# Altium PCB PCB1.PcbDoc
Units mm, origin at the board's own origin, x right, y up, seen from the top; angles counter-clockwise.
Board outline 90.17 x 95.89 mm, 4 copper layers (Top Layer, Internal Plane 1, Internal Plane 2, Bottom Layer), stack 1.347 mm thick; 6 components, 86 nets, 130 pads, 48 vias.
Unrouted connection lines stored in the file: 8.
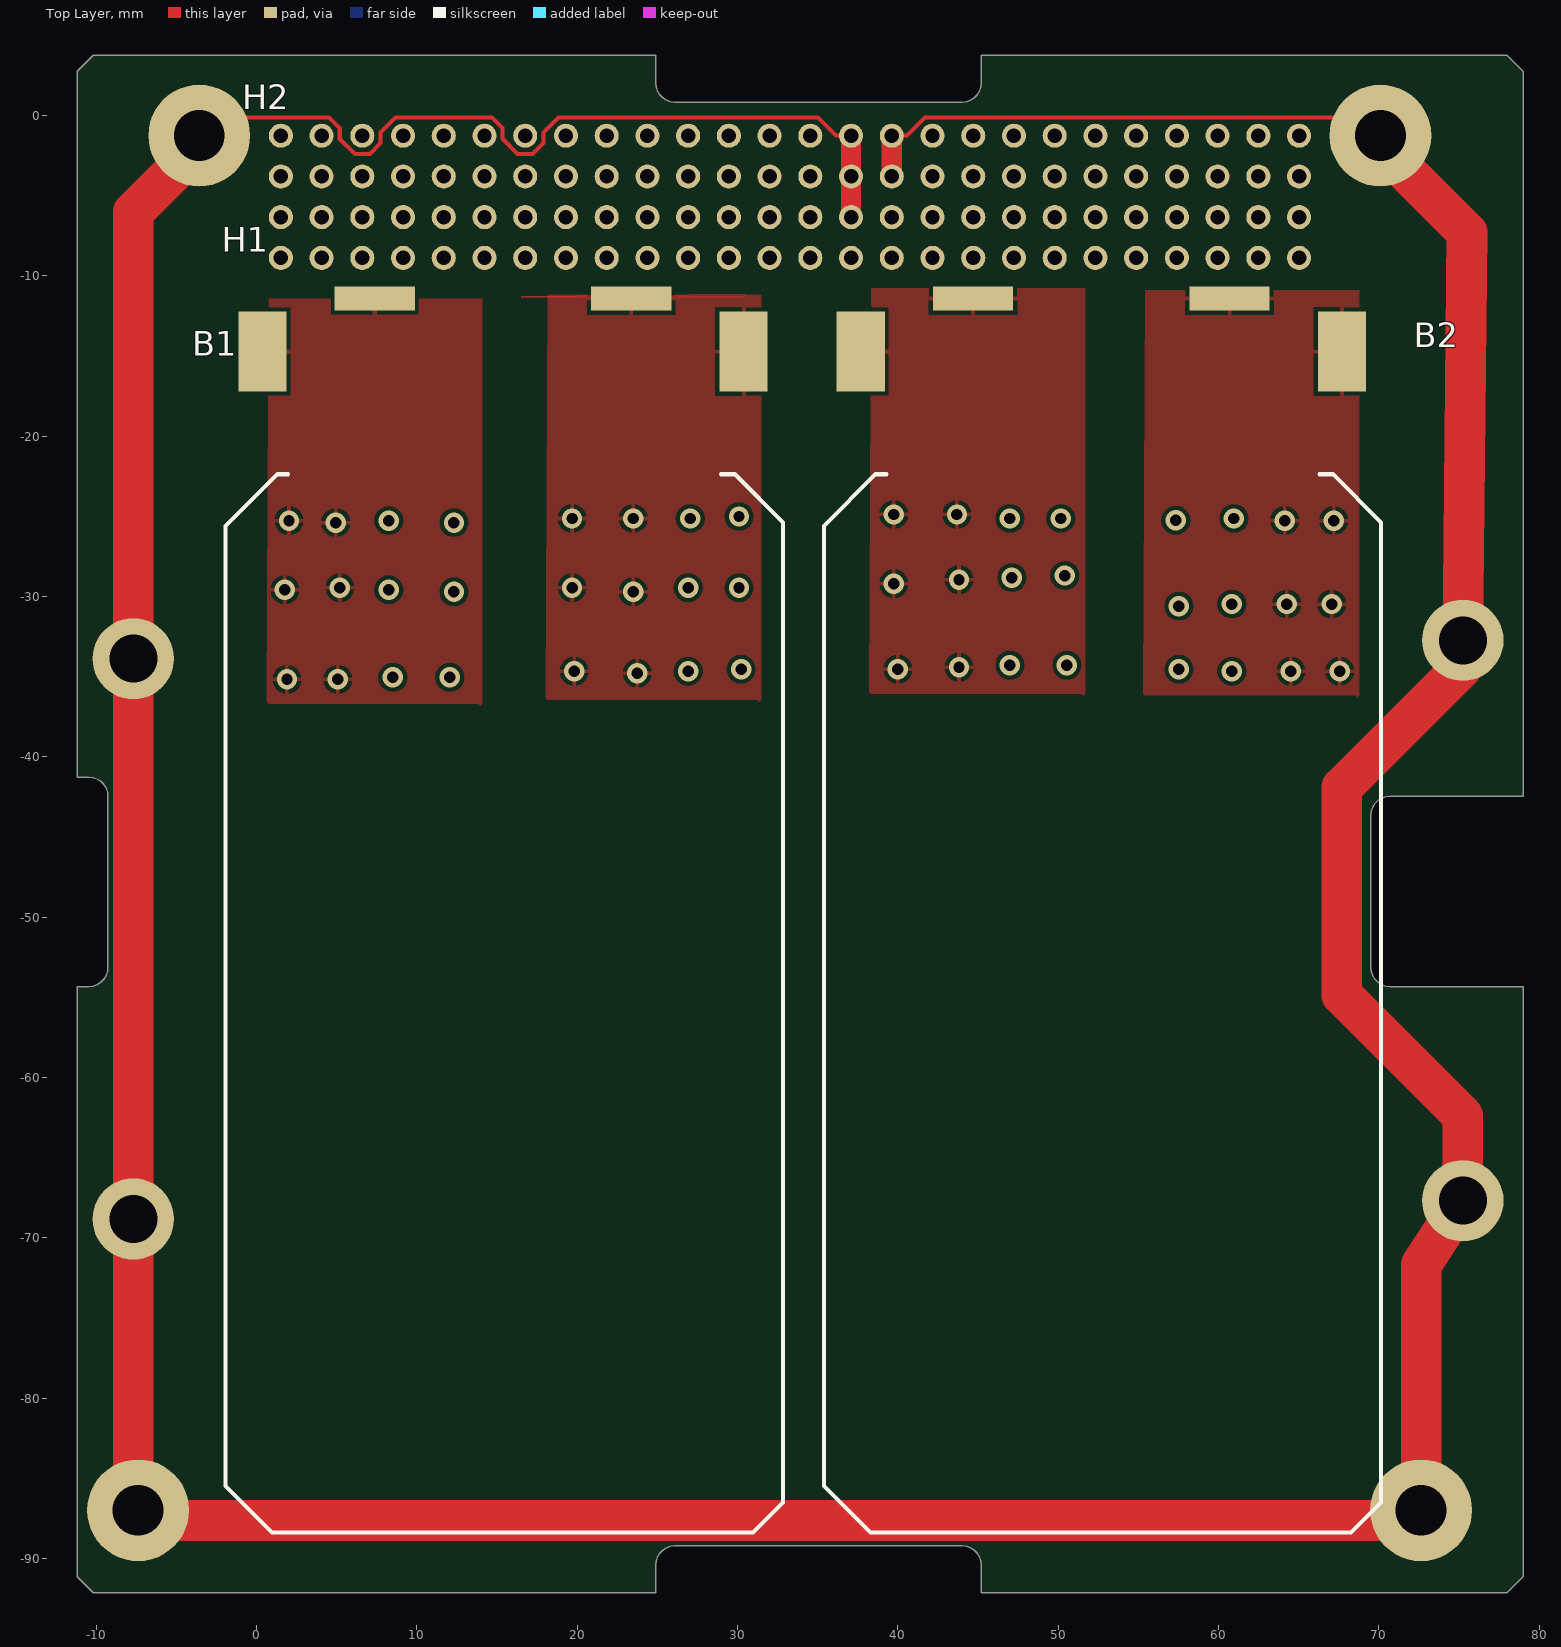
[diagram p0: Top Layer view]
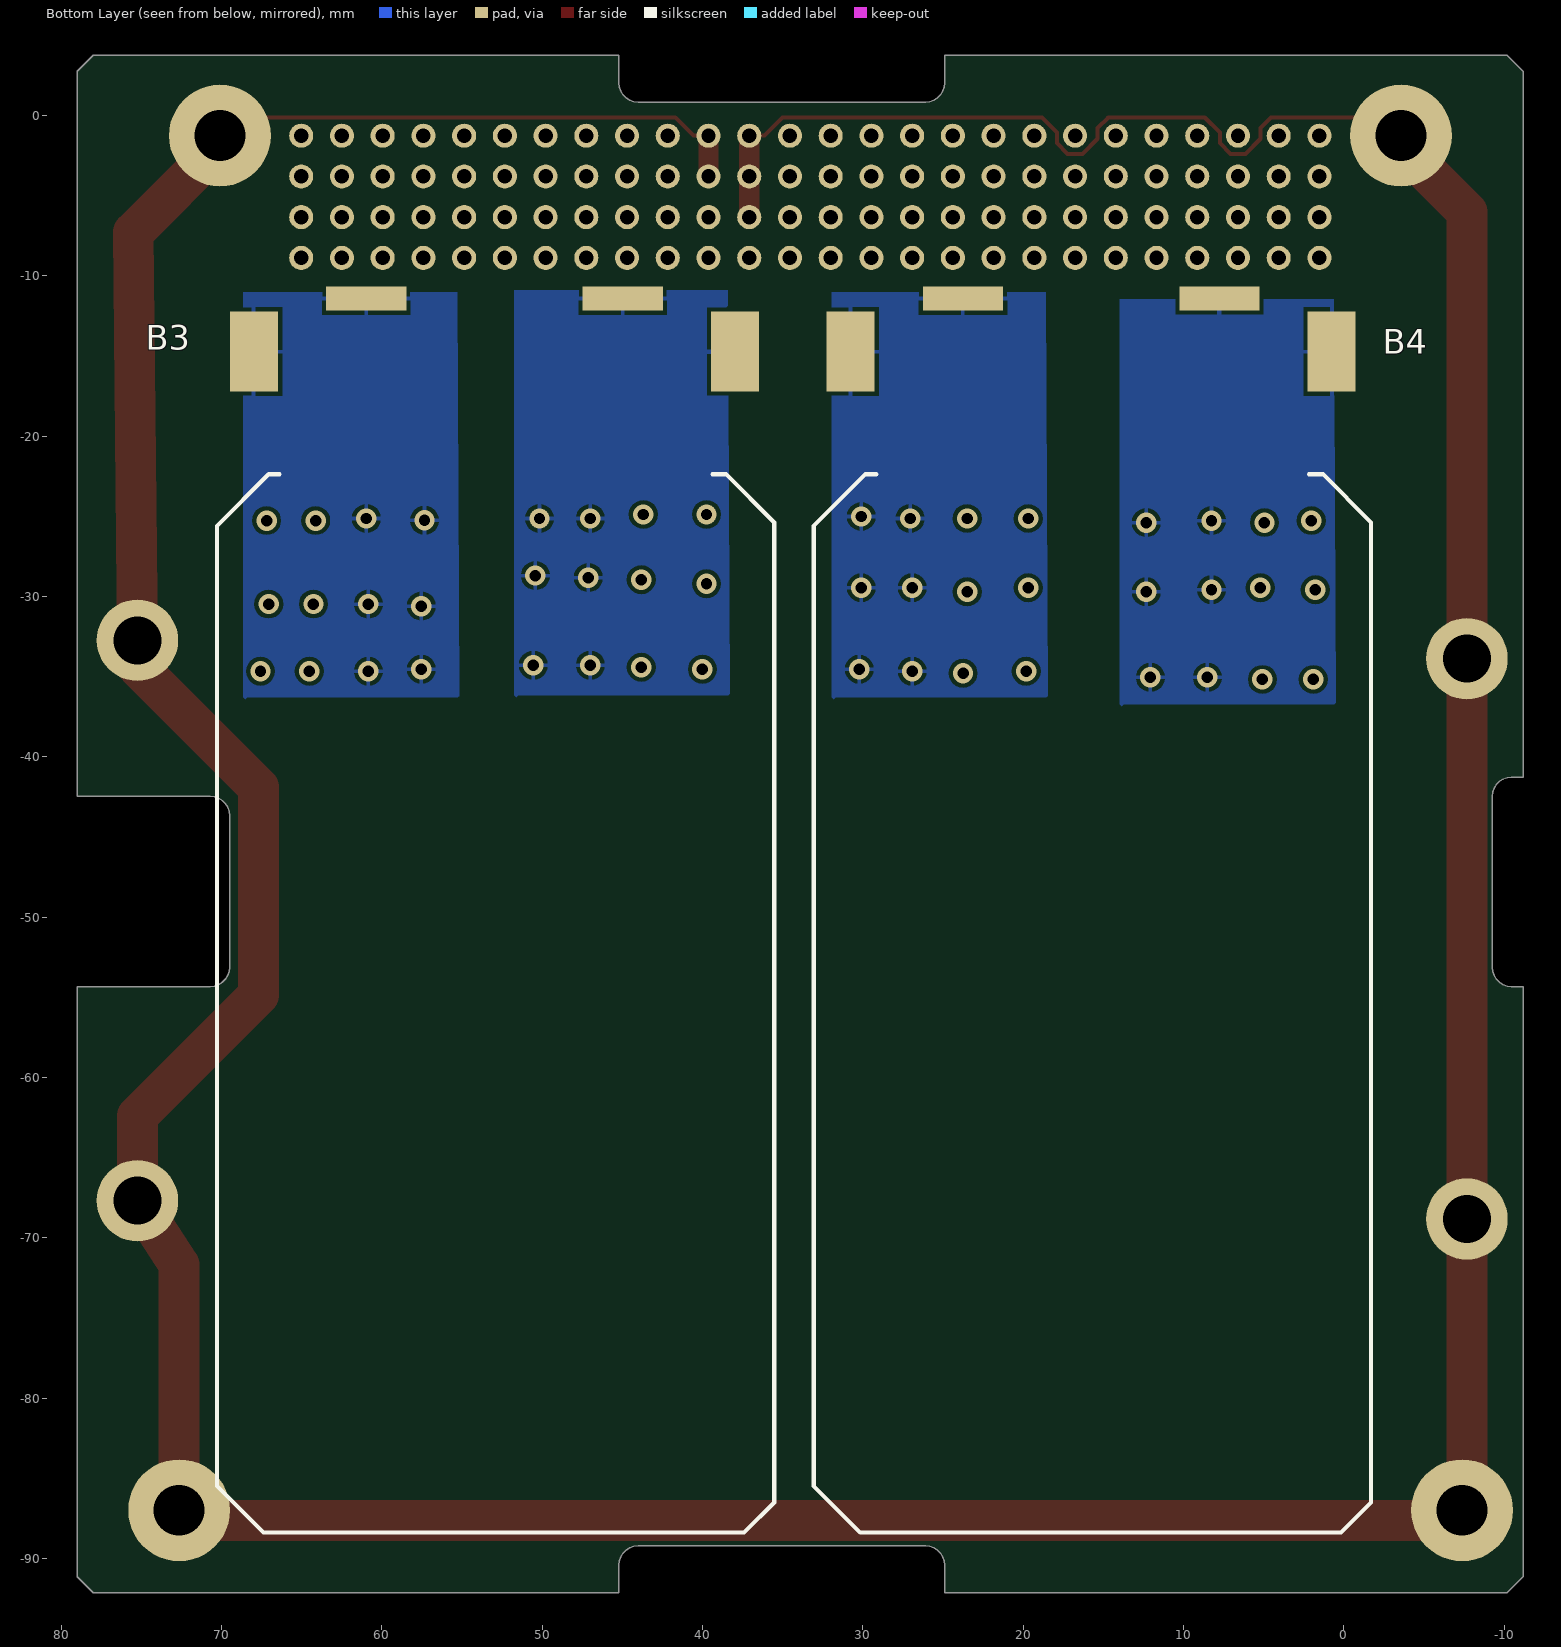
[diagram p1: Bottom Layer view, seen from below]
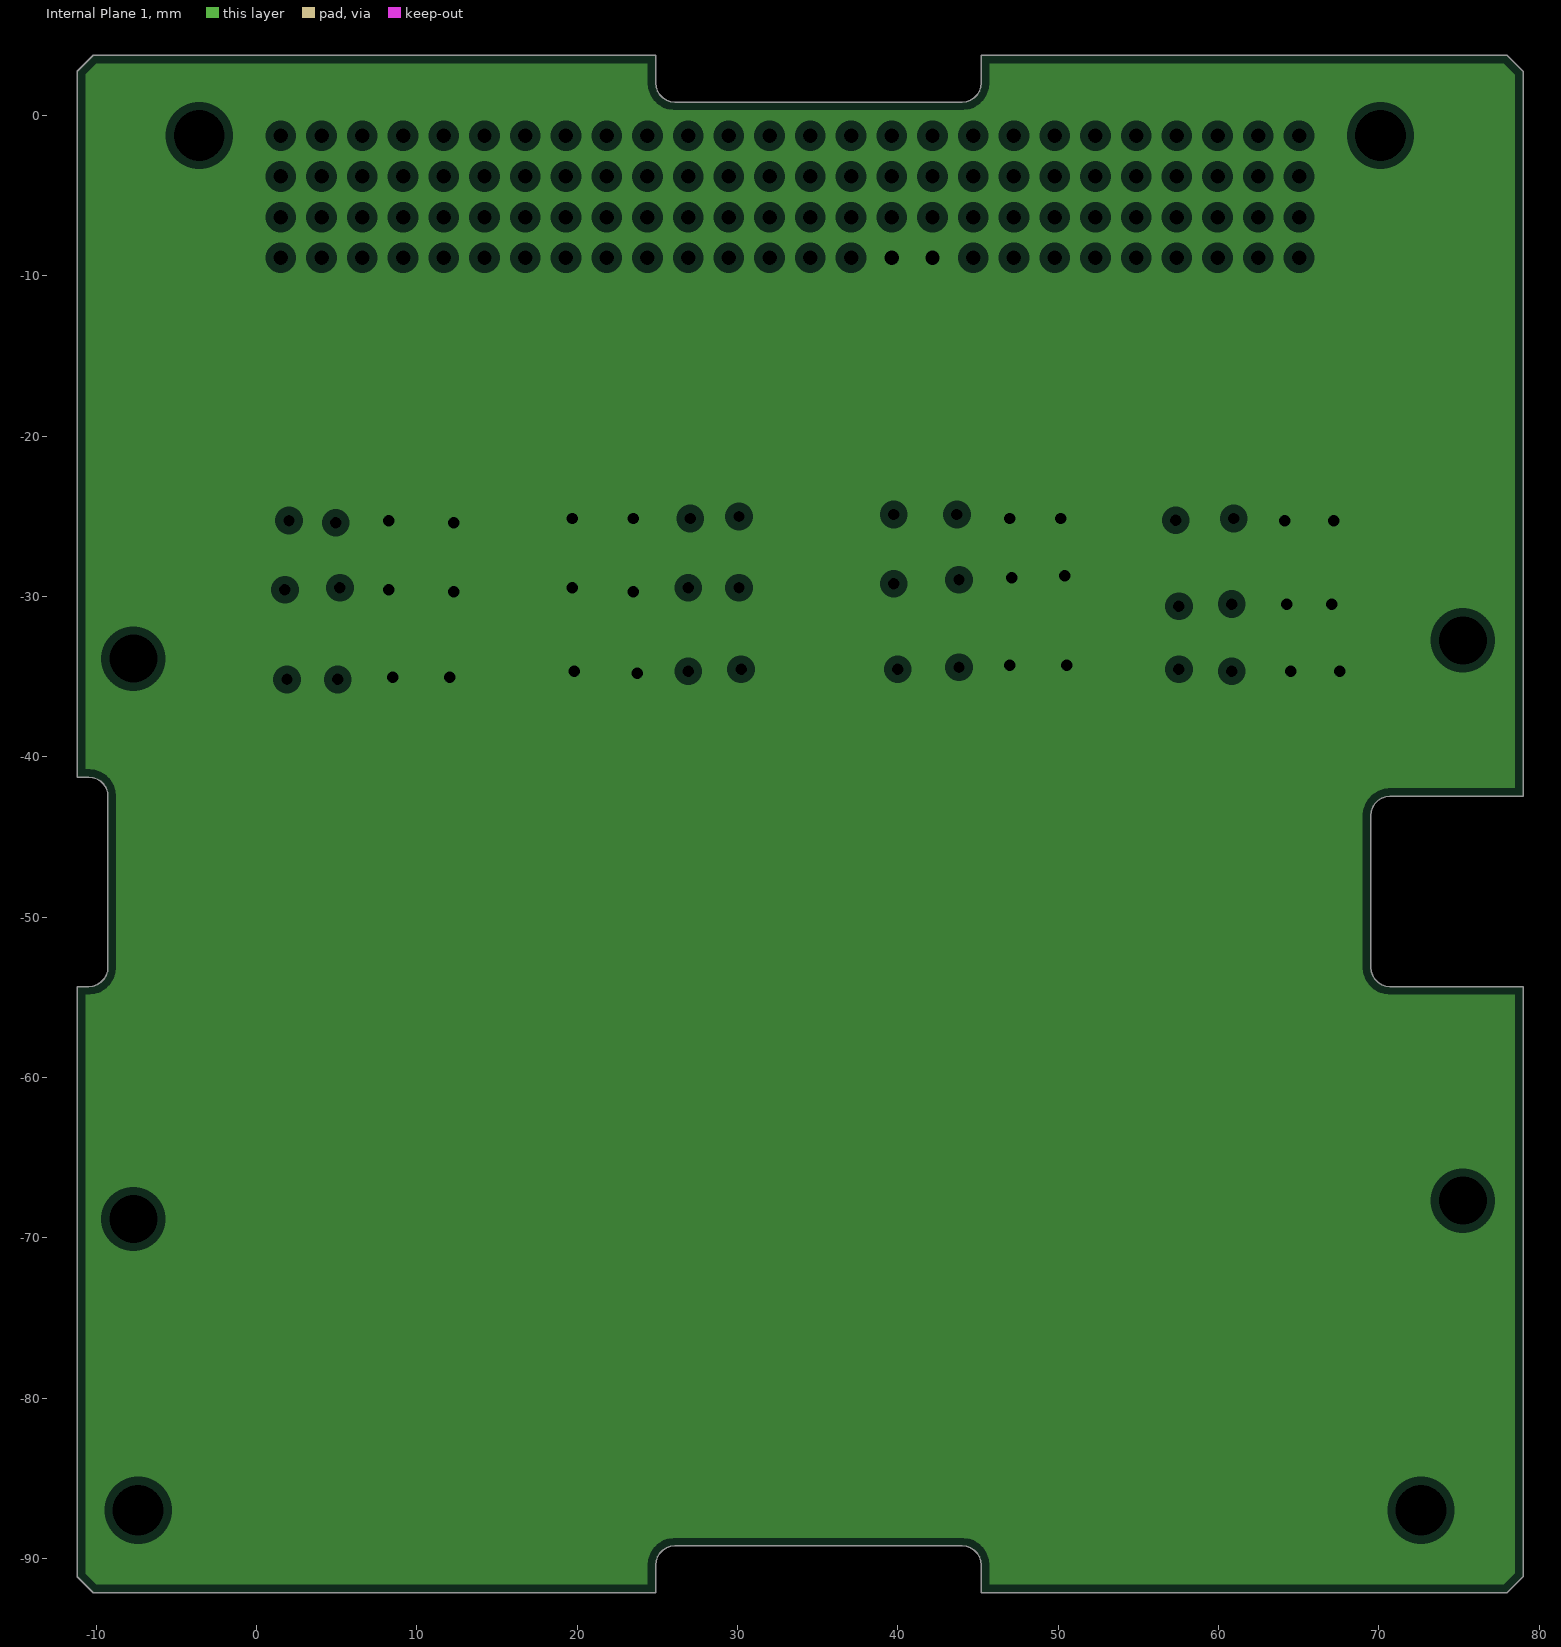
[diagram p2: Internal Plane 1, clearances drawn from the general rule]
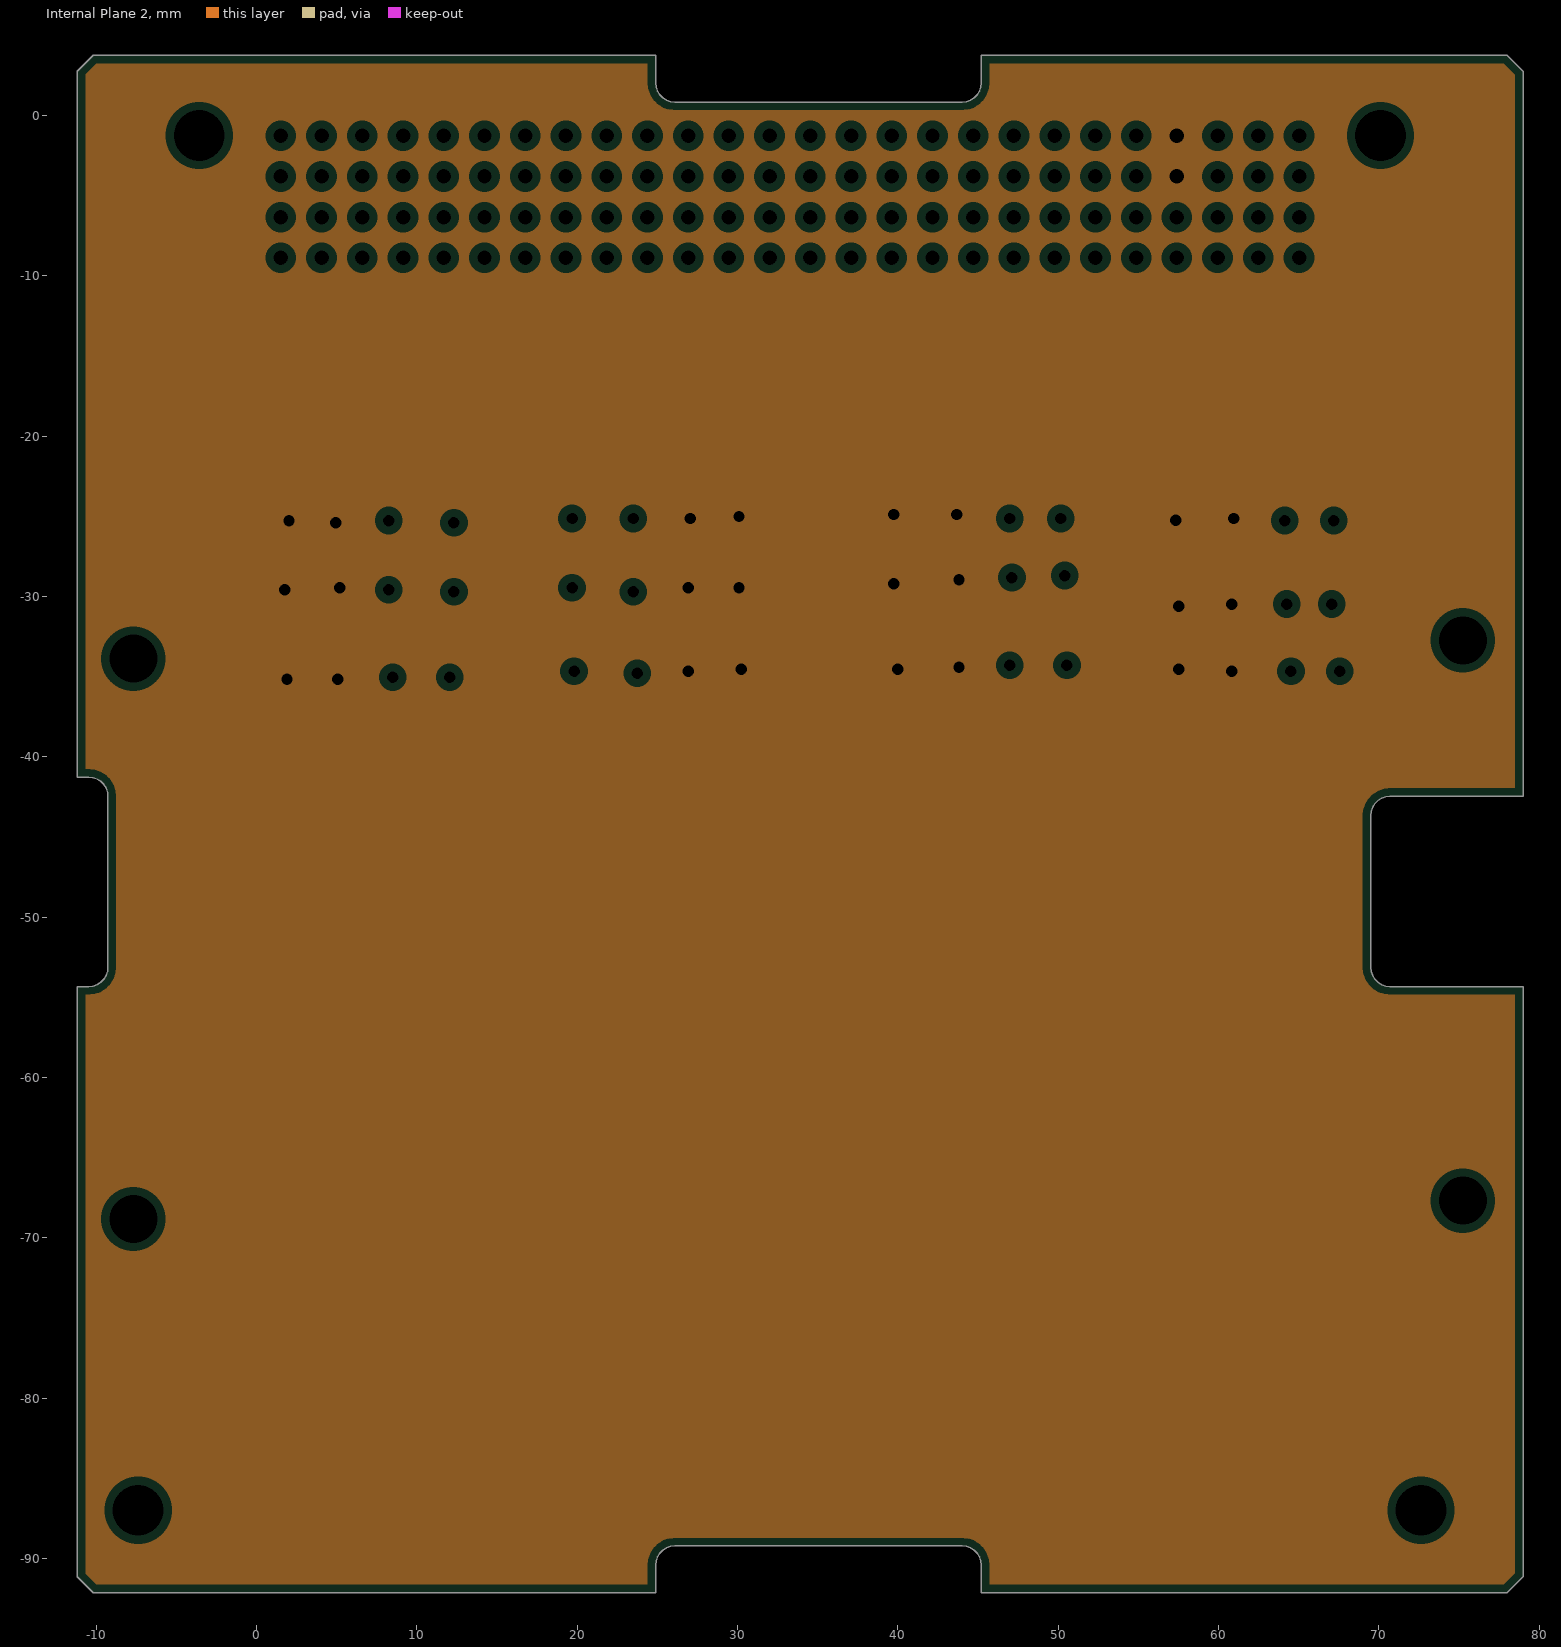
[diagram p3: Internal Plane 2, clearances drawn from the general rule]

## Layer stack, top to bottom
Top Solder: solder mask 0.0102, Solder Resist, Dk 3.5
Top Layer: signal copper 0.0356
Dielectric 1: core 0.475, FR-4, Dk 4.2
Internal Plane 1: plane copper 0.036, net VBAT-
Dielectric 3: core 0.254, Dk 4.2
Internal Plane 2: plane copper 0.036, net VIN
Dielectric 2: core 0.475, Dk 4.2
Bottom Layer: signal copper 0.0356
Bottom Solder: solder mask 0.0102, Solder Resist, Dk 3.5

## Board outline
77.994,3.749 45.214,3.749 45.214,2.029 45.184,1.762 45.095,1.508 44.952,1.281 44.762,1.091 44.535,0.948 44.281,0.859 44.014,0.829 26.094,0.829 25.827,0.859 25.573,0.948 25.346,1.091 25.156,1.281 25.013,1.508 24.924,1.762 24.894,2.029 24.894,3.749 -10.176,3.749 -11.176,2.749 -11.176,-41.271 -10.456,-41.271 -10.189,-41.301 -9.935,-41.39 -9.708,-41.533 -9.518,-41.723 -9.375,-41.95 -9.286,-42.204 -9.256,-42.471 -9.256,-53.131 -9.286,-53.398 -9.375,-53.652 -9.518,-53.879 -9.708,-54.069 -9.935,-54.212 -10.189,-54.301 -10.456,-54.331 -11.176,-54.331 -11.176,-91.141 -10.176,-92.141 24.894,-92.141 24.894,-90.421 24.924,-90.154 25.013,-89.9 25.156,-89.673 25.346,-89.483 25.573,-89.34 25.827,-89.251 26.094,-89.221 44.014,-89.221 44.281,-89.251 44.535,-89.34 44.762,-89.483 44.952,-89.673 45.095,-89.9 45.184,-90.154 45.214,-90.421 45.214,-92.141 77.994,-92.141 78.994,-91.141 78.994,-54.331 70.694,-54.331 70.427,-54.301 70.173,-54.212 69.946,-54.069 69.756,-53.879 69.613,-53.652 69.524,-53.398 69.494,-53.131 69.494,-43.671 69.524,-43.404 69.613,-43.15 69.756,-42.923 69.946,-42.733 70.173,-42.59 70.427,-42.501 70.694,-42.471 78.994,-42.471 78.994,2.749

## Design rules (kind name [scope] priority, off if disabled: settings)
Clearance [All] p1: gap=0.254
PlaneClearance [All] p1: clearance=0.508
PlaneConnect [All] p1: planeconnectstyle=Relief reliefexpansion=0.508 reliefentries=4 reliefconductorwidth=0.254 reliefairgap=0.254
PolygonConnect [All] p1: connectstyle=Relief reliefconductorwidth=0.254 reliefentries=4 polygonreliefangle="90 Angle" airgapwidth=0.254
RoutingVias [All] p1: holewidth=0.711 width=1.27 viastyle="Through Hole" minholewidth=0.711 minwidth=1.27 maxholewidth=0.711 maxwidth=1.27
SolderMaskExpansion [All] p1: expansion=0.102
Width [All] p1: maxlimit=0.254 minlimit=0.254 preferedwidth=0.254
27 further rules are at their usual default settings.

## Components (designator, comment, footprint, x,y, rotation, side; value= is the part's Value field where it differs from the comment)
B1 "Battery-Prot" Batt-Prot 15.381,-12.232 r0 top
B2 "Battery-Prot" Batt-Prot 52.691,-12.232 r0 top
B3 "Battery-Prot" Batt-Prot 52.973,-12.232 r180 bottom
B4 "Battery-Prot" Batt-Prot 15.762,-12.232 r180 bottom
H1 "H?" SAMTEC_ESQ_126_39_G_D 1.524,-8.89 r90 top
H2 "H?" SAMTEC_ESQ_126_39_G_D 1.524,-3.81 r90 top

## Footprints (in the part's own frame and the unit in brackets; to place one, negate y for a bottom-side part, rotate by r counter-clockwise, add the part's x,y. Pads: shape width x height; smd on the part's side, far side on the other; paste and mask are expansions set on the pad)
Batt-Prot [mm]
  rect 3x5 smd: EB+(-15,-2.5) EB-(15,-2.5)
  rect 5x1.5 smd: EB+(-8,0.8) EB-(8,0.8)
  silkscreen extent -17.3,-76.15 17.45,-10.15, body extent -17.43,-76.52 17.53,-0.1, height 8.97
SAMTEC_ESQ_126_39_G_D [mm]
  round 1.5 hole 0.9: 1(0,0) 2(2.54,0) 3(0,-2.54) 4(2.54,-2.54) 5(0,-5.08) 6(2.54,-5.08) 7(0,-7.62) 8(2.54,-7.62) 9(0,-10.16) 10(2.54,-10.16) 11(0,-12.7) 12(2.54,-12.7) 13(0,-15.24) 14(2.54,-15.24) 15(0,-17.78) 16(2.54,-17.78) 17(0,-20.32) 18(2.54,-20.32) 19(0,-22.86) 20(2.54,-22.86) 21(0,-25.4) 22(2.54,-25.4) 23(0,-27.94) 24(2.54,-27.94) 25(0,-30.48) 26(2.54,-30.48) 27(0,-33.02) 28(2.54,-33.02) 29(0,-35.56) 30(2.54,-35.56) 31(0,-38.1) 32(2.54,-38.1) 33(0,-40.64) 34(2.54,-40.64) 35(0,-43.18) 36(2.54,-43.18) 37(0,-45.72) 38(2.54,-45.72) 39(0,-48.26) 40(2.54,-48.26) 41(0,-50.8) 42(2.54,-50.8) 43(0,-53.34) 44(2.54,-53.34) 45(0,-55.88) 46(2.54,-55.88) 47(0,-58.42) 48(2.54,-58.42) 49(0,-60.96) 50(2.54,-60.96) 51(0,-63.5) 52(2.54,-63.5)
  body extent -1.27,-65.02 3.81,1.52, height 11.05

## Part data
H1 H2: library part SAMTEC_ESQ_126_39_G_D, "26X2 header"

## Free pads (board coordinates)
  round 5.08 hole 3: 1(-7.676,-68.831) 1(-7.676,-33.884) 1(75.24,-67.688) 1(75.24,-32.741)
  round 6.35 hole 3.175: 1(-7.375,-86.995) 1(-3.565,-1.265) 1(70.095,-1.265) 1(72.635,-86.995)
  round 0.5 on Drill Guide: 1(2.794,-8.951) 1(2.794,-3.871)

## Via types
v1: diameter 1.27, hole 0.711, Top Layer to Bottom Layer, 48 vias

## Nets (pads, with @x,y where several pads share a name; then routed paths per layer and width w, separated by ;. In a path a pad name is that pad's centre, name@x,y a point inside that pad or via, vN(x,y) a via of type N, cw(c..) or ccw(c..) an arc to the next point about the centre after c; other vN are vias at no path point)
1V: H1.34
5V: H2.25 H2.26
ACS3.3V: H1.27 H1.28
ACS_5V: H2.27 H2.28
"CTS MHX": H1.35
DIR-X: H2.12
DIR-Y: H2.11
DIR-Z: H2.9
"DSR MHX": H1.37
"DTR MHX": H1.38
FAULT: H1.25
GND: H1.2 H1.30 H2.29 H2.30 H2.31 H2.32 pad.1@70.095,-1.265 pad.1@72.635,-86.995 pad.1@75.24,-32.741 pad.1@75.24,-67.688 pad.1@-3.565,-1.265 pad.1@-7.375,-86.995 pad.1@-7.676,-33.884 pad.1@-7.676,-68.831 | length 349
  Top Layer w0.254: pad.1@-7.676,-87.32 pad.1@-7.366,-87.63 ; pad.1@-3.556,-1.905 -1.79,-0.139 4.532,-0.139 5.195,-0.802 5.195,-1.461 6.135,-2.401 7.072,-2.401 7.735,-1.739 7.735,-1.08 8.675,-0.139 14.692,-0.139 15.355,-0.802 15.355,-1.461 16.295,-2.401 17.232,-2.401 17.895,-1.739 17.895,-1.08 18.835,-0.139 35.012,-0.139 36.143,-1.27 H2.30 ; H2.32 40.564,-1.27 41.695,-0.139 68.338,-0.139 pad.1@70.104,-1.905 ; pad.1@75.24,-34.361 pad.1@75.24,-32.741
  Top Layer w1.27: H1.30 H2.29 H2.30 ; H2.31 H2.32
  Top Layer w2.54: pad.1@-7.676,-87.32 -7.676,-68.831 -7.676,-33.884 -7.676,-6.025 pad.1@-3.556,-1.905 ; pad.1@-7.366,-87.63 72.644,-87.63 72.644,-71.681 75.24,-67.688 75.24,-62.413 67.691,-54.864 67.691,-41.91 pad.1@75.24,-34.361 ; pad.1@70.104,-1.905 75.494,-7.295 pad.1@75.24,-32.741
IO0: H1.24
IO1: H1.23
IO2: H1.22
IO3: H1.21
IO4: H1.20
IO5: H1.19
IO6: H1.18
IO7: H1.17
IO8: H1.16
IO9: H1.15
IO10: H1.14
IO11: H1.13
IO12: H1.12
IO13: H1.11
IO14: H1.10
IO15: H1.9
IO16: H1.8
IO17: H1.7
IO18: H1.6
IO19: H1.5
IO20: H1.4
IO21: H1.3
IO23: H1.1
IO24: H2.24
IO25: H2.23
IO26: H2.22
IO28: H2.20
IO29: H2.19
IO30: H2.18
IO31: H2.17
IO32: H2.16
IO33: H2.15
IO34: H2.14
IO35: H2.13
IO38: H2.10
IO40: H2.8
IO41: H2.7
IO42: H2.6
IO43: H2.5
IO44: H2.4
IO45: H2.3
IO46: H2.2
IO47: H2.1
PA0: H2.47
PA1: H2.48
PA2: H2.49
PA3: H2.50
PA22: H1.26
PA30: H1.40
PA31: H1.39
PB26: H1.36
PC11: H2.51
PC16: H2.52
PC17: H2.34
PC18: H2.33
PC19: H2.36
PC20: H2.35
PC21: H2.38
PC22: H2.37
PC23: H2.40
PC24: H2.39
PC25: H2.42
PC26: H2.41
PC27: H2.44
PC28: H2.43
RSVD0: H1.44
RSVD1: H1.45
RSVD2: H1.46
USER0: H1.47 H1.49 H1.51
USER1: H1.48 H1.50 H1.52
VBACKUP: H1.42
VBAT-: B1.EB- B2.EB- B3.EB- B4.EB- H1.31 H1.33
  other v1: 8.509,-35.052 12.065,-35.052 23.749,-34.798 19.812,-34.671 64.516,-34.671 67.564,-34.671 46.99,-34.29 50.546,-34.29 64.262,-30.48 67.056,-30.48 12.319,-29.718 23.495,-29.718 8.255,-29.591 19.685,-29.464 47.117,-28.829 50.419,-28.702 12.319,-25.4 8.255,-25.273 64.126,-25.273 67.183,-25.273 19.685,-25.146 23.495,-25.146 46.99,-25.146 50.165,-25.146
VIN: B1.EB+ B2.EB+ B3.EB+ B4.EB+ H2.45 H2.46
  other v1: 1.905,-35.179 5.08,-35.179 26.924,-34.671 60.833,-34.671 30.226,-34.544 40.005,-34.544 57.531,-34.544 43.815,-34.417 57.531,-30.607 60.833,-30.48 1.778,-29.591 5.207,-29.464 26.924,-29.464 30.099,-29.464 39.751,-29.21 43.815,-28.956 4.953,-25.4 2.032,-25.273 57.337,-25.259 27.051,-25.146 60.96,-25.146 30.099,-25.019 39.751,-24.892 43.688,-24.892
WKUP: H1.29
pads on no net: H1.32 H1.41 H1.43 H2.21

## Polygon pours and split planes (outlines as drawn)
VIN on Top Layer "Signal Layer 1- 3V3" (solid, pour order 17): 0.762,-11.43 14.097,-11.43 14.097,-36.703 13.97,-36.83 13.843,-36.703 0.635,-36.703
VBAT- on Top Layer "Signal Layer 1- 3V3" (solid, pour order 18): 16.51,-11.303 30.353,-11.303 30.48,-11.176
VIN on Top Layer "Signal Layer 1- 3V3" (solid, pour order 16): 38.354,-10.795 51.689,-10.795 51.689,-36.068 51.562,-36.195 51.435,-36.068 38.227,-36.068
VBAT- on Top Layer "Signal Layer 1- 3V3" (solid, pour order 15): 18.161,-11.176 31.496,-11.176 31.496,-36.449 31.369,-36.576 31.242,-36.449 18.034,-36.449
VBAT- on Top Layer "Signal Layer 1- 3V3" (solid, pour order 14): 55.435,-10.904 68.77,-10.904 68.77,-36.177 68.643,-36.304 68.516,-36.177 55.308,-36.177
VIN on Bottom Layer "Signal Layer 1- 3V3" (solid, pour order 13): 55.308,-11.031 68.643,-11.031 68.643,-36.304 68.516,-36.431 68.389,-36.304 55.181,-36.304
VIN on Bottom Layer "Signal Layer 1- 3V3" (solid, pour order 12): 18.605,-11.031 31.94,-11.031 31.94,-36.304 31.813,-36.431 31.686,-36.304 18.478,-36.304
VBAT- on Bottom Layer "Signal Layer 1- 3V3" (solid, pour order 11): 38.417,-10.904 51.752,-10.904 51.752,-36.177 51.625,-36.304 51.498,-36.177 38.29,-36.177
VBAT- on Bottom Layer "Signal Layer 1- 3V3" (solid, pour order 10): 0.636,-11.462 13.971,-11.462 13.971,-36.735 13.844,-36.862 13.717,-36.735 0.509,-36.735
VBAT- on Internal Plane 1 (split plane): 401 vertices, not listed, extent -10.666,-91.631 78.484,3.238
VIN on Internal Plane 2 (split plane): 401 vertices, not listed, extent -10.666,-91.631 78.484,3.238